# Altium PCB PCB4.PcbDoc
Units mil, origin at the board's own origin, x right, y up, seen from the top; angles counter-clockwise.
Board outline 1500 x 1100 mil, 2 copper layers (Top Layer, Bottom Layer); 7 components, 4 nets, 26 pads, 0 vias.
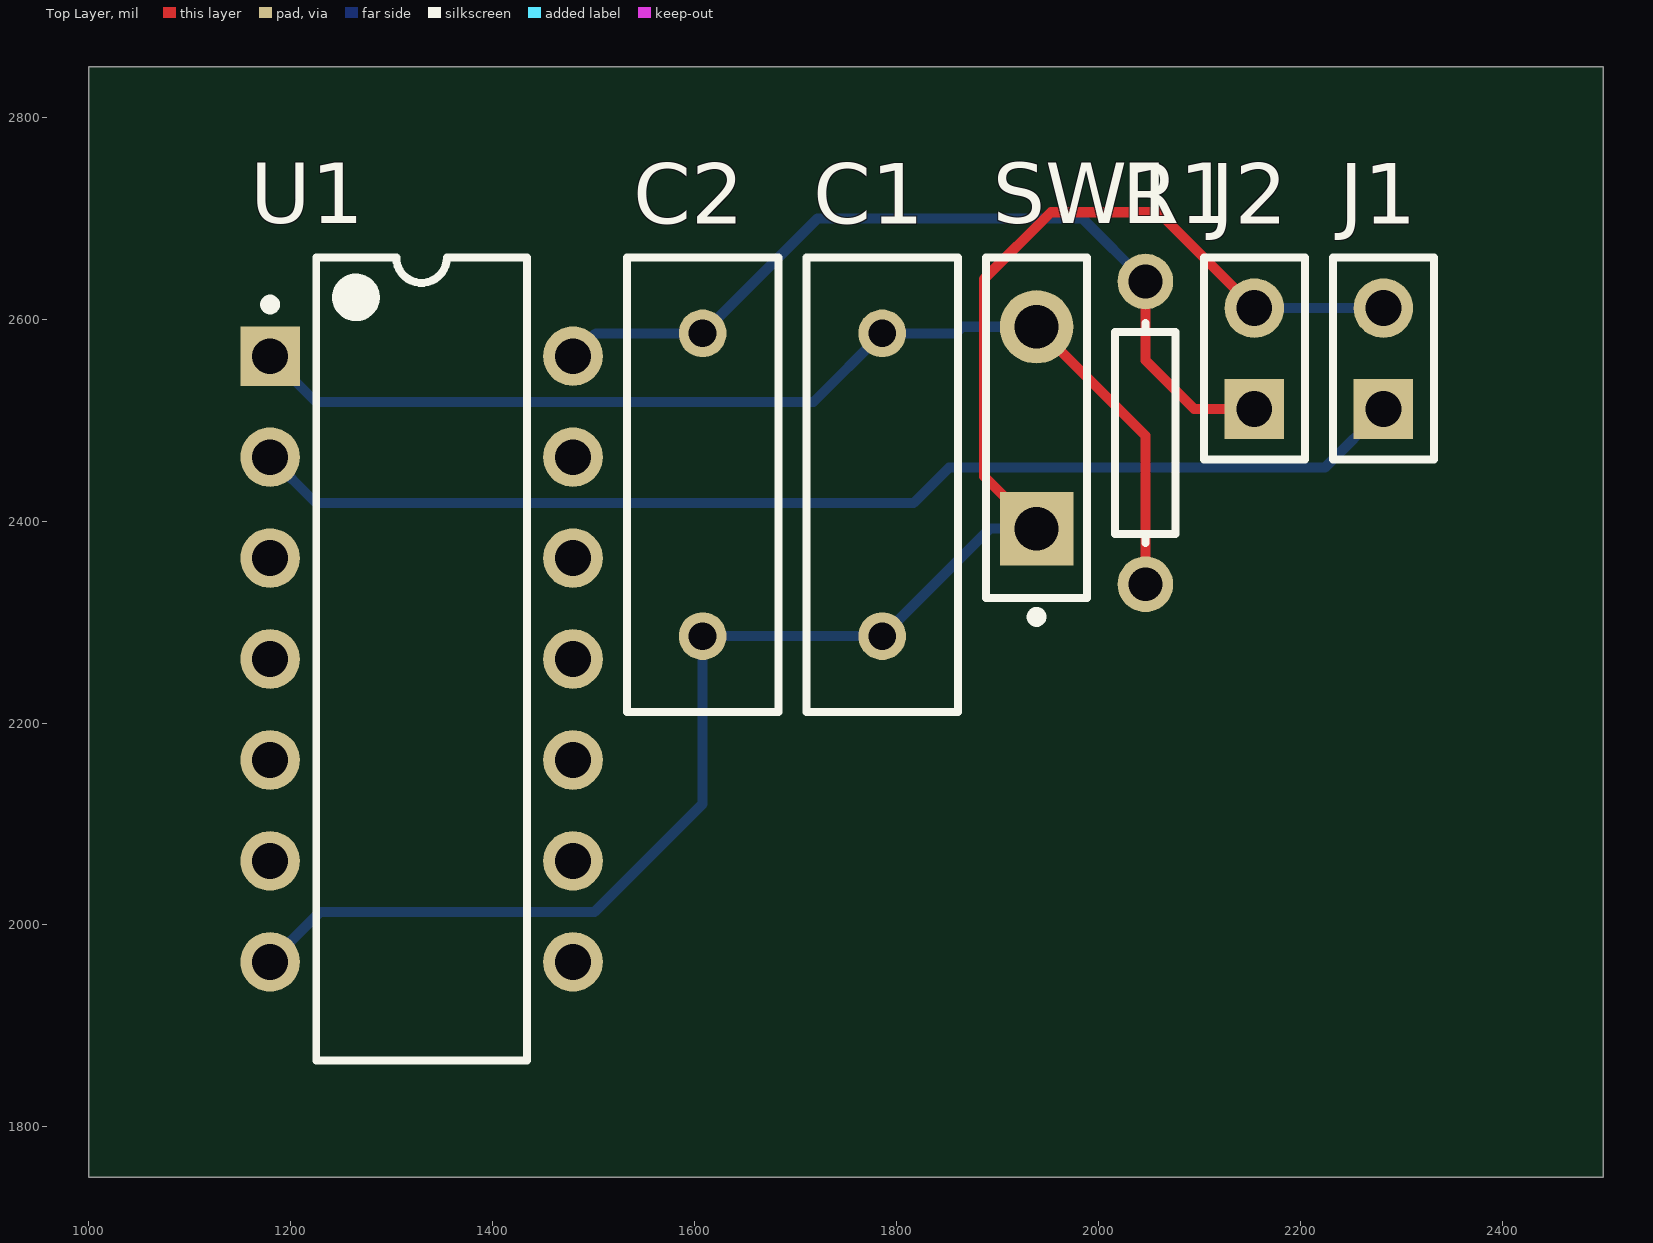
[diagram p0: Top Layer view]
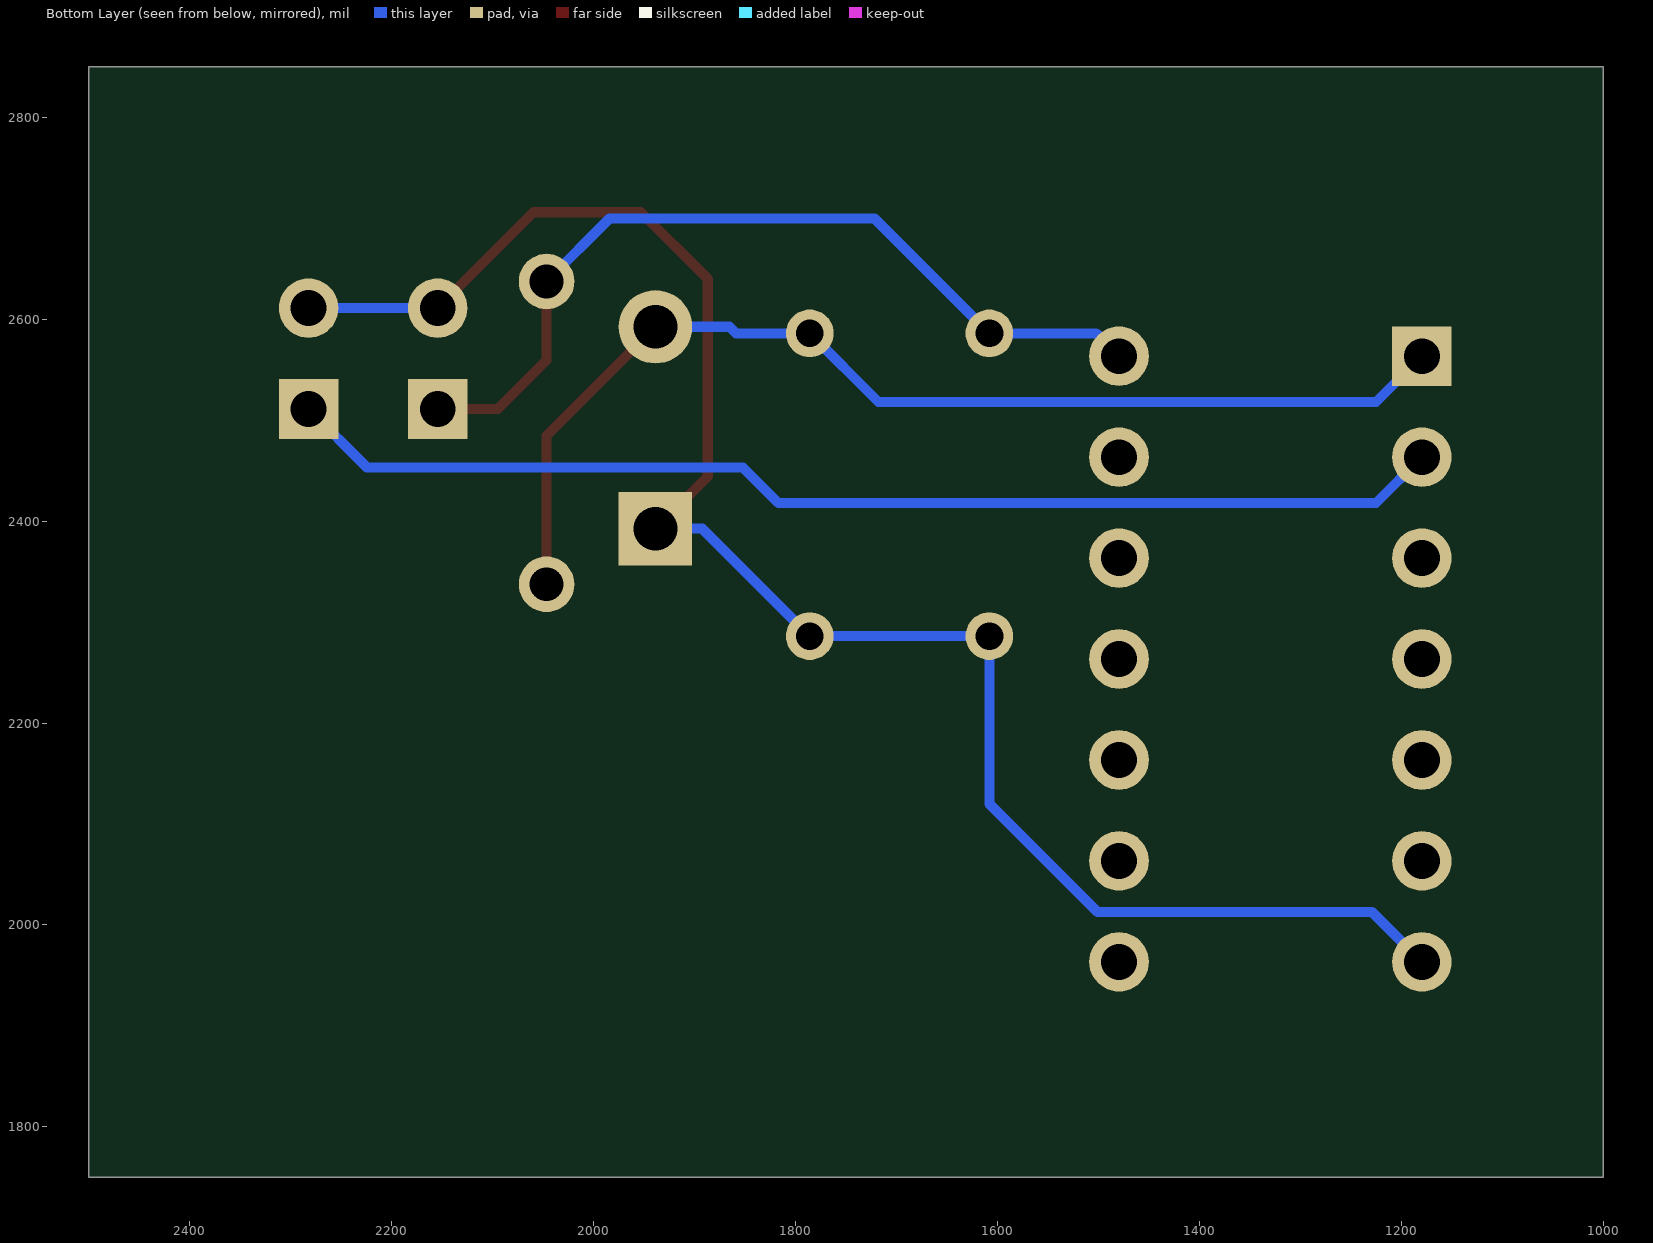
[diagram p1: Bottom Layer view, seen from below]

## Layer stack, top to bottom
Top Solder: solder mask 0.4, Solder Resist, Dk 3.5
Top Layer: signal copper 1.4
Dielectric 1: dielectric 12.6, FR-4, Dk 4.8
Bottom Layer: signal copper 1.4
Bottom Solder: solder mask 0.4, Solder Resist, Dk 3.5

## Board outline
1000,1750 2500,1750 2500,2850 1000,2850

## Design rules (kind name [scope] priority, off if disabled: settings)
Clearance [All] p1: gap=10 ignorepadtopadclearanceinfootprint=FALSE
PolygonConnect [All] p1: connectstyle=Relief reliefconductorwidth=10 reliefentries=4 polygonreliefangle="90 Angle" airgapwidth=10
RoutingVias [All] p1: holewidth=28 width=50 viastyle="Through Hole" minholewidth=28 minwidth=50 maxholewidth=28 maxwidth=50
SolderMaskExpansion [All] p1: expansion=0 istentingtop=FALSE
SupplyNets "Schematic Supply Nets_1" [InNet('GND')] p1: voltage=0.000
SupplyNets "Schematic Supply Nets" [InNet('VCC')] p2: voltage=0.000
Width [All] p1: maxlimit=10 minlimit=10 preferedwidth=10
30 further rules are at their usual default settings.

## Components (designator, comment, footprint, x,y, rotation, side; value= is the part's Value field where it differs from the comment)
C1 "Cap" RAD-0.3 1785.87,2436.06 r90 top value=100nF
C2 "Cap" RAD-0.3 1607.99,2436.06 r90 top value=100nF
J1 "Header 2" HDR1X2 2282.36,2511.06 r90 top
J2 "Header 2" HDR1X2 2154.49,2511.06 r90 top
R1 "Res1" AXIAL-0.3 2046.61,2487.44 r90 top value=10k
SW1 "SW-PB" SPST-2 1938.74,2492.56 r90 top
U1 "74HC14" DIP-14 1329.53,2263.43 r0 top

## Footprints (in the part's own frame and the unit in brackets; to place one, negate y for a bottom-side part, rotate by r counter-clockwise, add the part's x,y. Pads: shape width x height; smd on the part's side, far side on the other; paste and mask are expansions set on the pad)
AXIAL-0.3 [mm] "Axial Device, Thru-Hole; 2 Leads; 0.3 in Pin Spacing"
  round 1.4 hole 0.85: 1(-3.81,0) 2(3.81,0)
  silkscreen extent -2.77,-0.76 2.77,0.76
DIP-14 [mm] "DIP; 14 Leads; Row Spacing 7.62 mm; Pitch 2.54 mm"
  rect 1.5x1.5 hole 0.9: 1(-3.81,7.62)
  round 1.5 hole 0.9: 2(-3.81,5.08) 3(-3.81,2.54) 4(-3.81,0) 5(-3.81,-2.54) 6(-3.81,-5.08) 7(-3.81,-7.62) 8(3.81,-7.62) 9(3.81,-5.08) 10(3.81,-2.54) 11(3.81,0) 12(3.81,2.54) 13(3.81,5.08) 14(3.81,7.62)
  silkscreen extent -3.93,-10.1 2.65,10.1, body extent -3.6,-10.1 3.6,10.1, height 5.08
HDR1X2 [mm] "Connector; Header; 2 Position"
  rect 1.5x1.5 hole 0.9: 1(0,0)
  round 1.5 hole 0.9: 2(2.54,0)
  silkscreen extent -1.27,-1.27 3.81,1.27
RAD-0.3 [mm] "Radial Cap, Thru-Hole; 2 Leads; 0.3 in Pin Spacing"
  round 1.2 hole 0.7: 1(-3.81,0) 2(3.81,0)
  silkscreen extent -5.71,-1.91 5.72,1.91
SPST-2 [mm] "Switch; 2 Leads"
  rect 1.85x1.85 hole 1.1: 1(-2.54,0)
  round 1.85 hole 1.1: 2(2.54,0)
  silkscreen extent -4.89,-1.27 4.28,1.27

## Part data
C1: "Ceramic capacitor 100 nF (debounce)", Manufacturer=KEMET, Manufacturer Part Number=C320C104K5R5TA, LatestRevisionDate=17-Jul-2002, LatestRevisionNote="Re-released for DXP Platform.", PackageDescription="Radial Cap, Thru-Hole; 2 Leads; 0.3 in Pin Spacing", PackageReference=RAD-0.3, Published=8-Jun-2000, Publisher="Altium Limited"
C2: "Ceramic capacitor 100 nF (decoupling of U1)", Manufacturer=KEMET, Manufacturer Part Number=C320C104K5R5TA, LatestRevisionDate=17-Jul-2002, LatestRevisionNote="Re-released for DXP Platform.", PackageDescription="Radial Cap, Thru-Hole; 2 Leads; 0.3 in Pin Spacing", PackageReference=RAD-0.3, Published=8-Jun-2000, Publisher="Altium Limited"
J1: "Header 2 pin, 2.54 mm: clean output (OUT, GND)", Manufacturer=Generic, Manufacturer Part Number="Pin header 1x2", LatestRevisionDate=17-Jul-2002, LatestRevisionNote="Re-released for DXP Platform.", Publisher="Altium Limited"
J2: "Header 2 pin, 2.54 mm: power input (VCC, GND)", Manufacturer=Generic, Manufacturer Part Number="Pin header 1x2", LatestRevisionDate=17-Jul-2002, LatestRevisionNote="Re-released for DXP Platform.", Publisher="Altium Limited"
R1: "Resistor 10 kohm 1/4 W, pull-up", Manufacturer=Yageo, Manufacturer Part Number=CFR-25JB-52-10K, LatestRevisionDate=17-Jul-2002, LatestRevisionNote="Re-released for DXP Platform.", PackageDescription="Axial Device, Thru-Hole; 2 Leads; 0.3 in Pin Spacing", PackageReference=AXIAL-0.3, Published=8-Jun-2000, Publisher="Altium Limited"
SW1: "Push button, normally open", Manufacturer=Generic, Manufacturer Part Number="Tactile switch 6x6", LatestRevisionDate=17-Jul-2002, LatestRevisionNote="Re-released for DXP Platform.", PackageDescription="Switch; 2 Leads", PackageReference=SPST-2, Published=24-Mar-1999, Publisher="Altium Limited"
U1: "Hex Schmitt-trigger inverter (gate A used)", Manufacturer="Texas Instruments", Manufacturer Part Number=SN74HC14N

## Nets (pads, with @x,y where several pads share a name; then routed paths per layer and width w, separated by ;. In a path a pad name is that pad's centre, name@x,y a point inside that pad or via, vN(x,y) a via of type N, cw(c..) or ccw(c..) an arc to the next point about the centre after c; other vN are vias at no path point)
BTN: C1.2 R1.1 SW1.2 U1.1 | length 1108.7
  Top Layer w10: SW1.2 2046.61,2484.69 R1.1
  Bottom Layer w10: U1.1 1224.95,2518 1717.8,2518 C1.2 1859,2586.06 1865.5,2592.56 SW1.2
GND: C1.1 C2.1 J1.2 J2.2 SW1.1 U1.7 | length 1765.1
  Top Layer w10: SW1.1 1887,2444.3 1887,2640 1953,2706 2059.55,2706 J2.2
  Bottom Layer w10: U1.7 1229.1,2013 1501,2013 1607.99,2119.99 C2.1 C1.1 1892.36,2392.56 SW1.1 ; J2.2 J1.2
OUT: J1.1 U1.2 | length 1160.2
  Bottom Layer w10: U1.2 1224.95,2418 1817,2418 1852,2453 2224.3,2453 J1.1
VCC: C2.2 J2.1 R1.2 U1.14 | length 855.5
  Top Layer w10: R1.2 2046.61,2559.39 2094.94,2511.06 J2.1
  Bottom Layer w10: U1.14 1502.17,2586.06 C2.2 1721.93,2700 1984.06,2700 R1.2
pads on no net: U1.3 U1.4 U1.5 U1.6 U1.8 U1.9 U1.10 U1.11 U1.12 U1.13